# EAGLE board Controller3 (EAGLE 5.10)

Size 116.21 x 231.14 mm. Coordinates in mm from the lower left corner, seen from the top.
Outline: 0,7.62 0,10.16
Outline: 0,10.16 0,12.7
Outline: 0,12.7 0,15.24
Outline: 0,15.24 0,17.78
Outline: 0,33.02 5.72,33.02
Outline: 5.72,33.02 10.16,33.02
Outline: 10.16,33.02 14.61,33.02
Outline: 14.61,33.02 19.05,33.02
Outline: 19.05,33.02 23.5,33.02
Outline: 23.5,33.02 27.94,33.02
Outline: 27.94,33.02 32.39,33.02
Outline: 32.39,33.02 36.83,33.02
Outline: 36.83,33.02 41.28,33.02
Outline: 41.28,33.02 45.72,33.02
Outline: 45.72,33.02 50.16,33.02
Outline: 50.16,33.02 54.61,33.02
Outline: 59.06,33.02 63.5,33.02
Outline: 63.5,33.02 67.95,33.02
Outline: 67.95,33.02 72.39,33.02
Outline: 72.39,33.02 76.84,33.02
Outline: 76.84,33.02 81.28,33.02
Outline: 81.28,33.02 85.73,33.02
Outline: 85.73,33.02 90.17,33.02
Outline: 90.17,33.02 94.62,33.02
Outline: 94.62,33.02 99.06,33.02
Outline: 99.06,33.02 103.5,33.02
Outline: 103.5,33.02 110.49,33.02
Outline: 116.21,24.77 116.21,27.94
Outline: 116.21,27.94 116.21,33.02
Outline: 7.62,5.08 0,5.08
Outline: 50.16,9.53 53.98,9.53 53.98,3.81
Outline: 50.16,9.53 43.18,9.53 43.18,24.77 60.33,24.77 60.33,3.81
Outline: 50.16,9.53 50.16,5.08 42.55,5.08 37.47,10.16 11.43,10.16 11.43,17.78 6.99,17.78
Outline: 73.03,9.53 69.22,9.53
Outline: 73.03,9.53 79.38,9.53
Outline: 69.22,9.53 69.22,3.81 60.33,3.81
Outline: 73.03,9.53 73.03,2.54
Outline: 92.08,9.53 88.27,9.53
Outline: 88.27,9.53 81.92,9.53 81.92,24.77 98.42,24.77 98.42,9.53
Outline: 92.08,9.53 98.42,9.53
Outline: 88.27,9.53 88.27,2.54 79.38,2.54
Outline: 92.08,9.53 92.08,1.27
Outline: 110.49,9.53 106.68,9.53
Outline: 106.68,9.53 100.33,9.53 100.33,24.77 116.21,24.77
Outline: 110.49,9.53 116.21,9.53
Outline: 116.21,9.53 116.21,24.77
Outline: 116.21,9.53 116.21,0 110.49,0
Outline: 69.22,9.53 62.87,9.53 62.87,24.77 79.38,24.77 79.38,9.53
Outline: 6.99,17.78 6.99,20.32 0,20.32
Outline: 6.99,17.78 0,17.78
Outline: 0,20.32 0,27.94
Outline: 0,27.94 0,33.02
Outline: 110.49,0 0,0 0,7.62
Outline: 110.49,9.53 110.49,0
Outline: 106.68,9.53 106.68,1.27 98.42,1.27
Outline: 98.42,1.27 92.08,1.27
Outline: 79.38,1.27 40.64,1.27
Outline: 40.64,1.27 7.62,1.27 7.62,5.08
Outline: 98.42,1.27 98.42,9.53
Outline: 79.38,2.54 73.03,2.54
Outline: 92.08,1.27 78.74,1.27
Outline: 79.38,9.53 79.38,2.54
Outline: 73.03,2.54 41.28,2.54 36.2,7.62 8.89,7.62 8.89,12.7 0,12.7
Outline: 40.64,1.27 35.56,6.35 7.62,6.35
Outline: 60.33,3.81 53.98,3.81
Outline: 53.98,3.81 41.91,3.81 36.83,8.89 10.16,8.89 10.16,15.24 0,15.24
Outline: 0,10.16 7.62,10.16 7.62,7.62
Outline: 7.62,7.62 7.62,6.35
Outline: 7.62,5.08 7.62,6.35
Outline: 0,7.62 7.62,7.62
Outline: 0,17.78 0,20.32
Outline: 0,27.94 5.72,27.94
Outline: 5.72,27.94 10.16,27.94
Outline: 10.16,27.94 14.61,27.94
Outline: 14.61,27.94 19.05,27.94
Outline: 19.05,27.94 23.5,27.94
Outline: 23.5,27.94 27.94,27.94
Outline: 27.94,27.94 32.39,27.94
Outline: 32.39,27.94 36.83,27.94
Outline: 36.83,27.94 41.28,27.94
Outline: 41.28,27.94 45.72,27.94
Outline: 45.72,27.94 50.16,27.94
Outline: 50.16,27.94 54.61,27.94
Outline: 54.61,27.94 59.06,27.94
Outline: 59.06,27.94 63.5,27.94
Outline: 63.5,27.94 67.95,27.94
Outline: 67.95,27.94 72.39,27.94
Outline: 72.39,27.94 76.84,27.94
Outline: 76.84,27.94 81.28,27.94
Outline: 81.28,27.94 85.73,27.94
Outline: 85.73,27.94 90.17,27.94
Outline: 90.17,27.94 94.62,27.94
Outline: 94.62,27.94 99.06,27.94
Outline: 99.06,27.94 103.5,27.94
Outline: 116.21,27.94 107.95,27.94
Outline: 107.95,27.94 103.5,27.94
Outline: 103.5,27.94 103.5,33.02
Outline: 99.06,27.94 99.06,33.02
Outline: 94.62,27.94 94.62,33.02
Outline: 90.17,27.94 90.17,33.02
Outline: 85.73,27.94 85.73,33.02
Outline: 81.28,27.94 81.28,33.02
Outline: 76.84,27.94 76.84,33.02
Outline: 72.39,27.94 72.39,33.02
Outline: 67.95,27.94 67.95,33.02
Outline: 63.5,27.94 63.5,33.02
Outline: 59.06,27.94 59.06,33.02
Outline: 54.61,27.94 54.61,33.02
Outline: 50.16,27.94 50.16,33.02
Outline: 45.72,27.94 45.72,33.02
Outline: 41.28,27.94 41.28,33.02
Outline: 36.83,27.94 36.83,33.02
Outline: 32.39,27.94 32.39,33.02
Outline: 27.94,27.94 27.94,33.02
Outline: 23.5,27.94 23.5,33.02
Outline: 19.05,27.94 19.05,33.02
Outline: 14.61,27.94 14.61,33.02
Outline: 10.16,27.94 10.16,33.02
Outline: 5.72,27.94 5.72,33.02
Outline: 107.95,27.94 107.95,33.02
Outline: 0,40.64 0,43.18
Outline: 0,43.18 0,45.72
Outline: 0,45.72 0,48.26
Outline: 0,48.26 0,50.8
Outline: 0,66.04 5.72,66.04
Outline: 5.72,66.04 10.16,66.04
Outline: 10.16,66.04 14.61,66.04
Outline: 14.61,66.04 19.05,66.04
Outline: 19.05,66.04 23.5,66.04
Outline: 23.5,66.04 27.94,66.04
Outline: 27.94,66.04 32.39,66.04
Outline: 32.39,66.04 36.83,66.04
Outline: 36.83,66.04 41.28,66.04
Outline: 41.28,66.04 45.72,66.04
Outline: 45.72,66.04 50.16,66.04
Outline: 50.16,66.04 54.61,66.04
Outline: 59.06,66.04 63.5,66.04
Outline: 63.5,66.04 67.95,66.04
Outline: 67.95,66.04 72.39,66.04
Outline: 72.39,66.04 76.84,66.04
Outline: 76.84,66.04 81.28,66.04
Outline: 81.28,66.04 85.73,66.04
Outline: 85.73,66.04 90.17,66.04
Outline: 90.17,66.04 94.62,66.04
Outline: 94.62,66.04 99.06,66.04
Outline: 99.06,66.04 103.5,66.04
Outline: 103.5,66.04 110.49,66.04
Outline: 116.21,57.78 116.21,60.96
Outline: 116.21,60.96 116.21,66.04
Outline: 7.62,38.1 0,38.1
Outline: 50.16,42.55 53.98,42.55 53.98,36.83
Outline: 50.16,42.55 43.18,42.55 43.18,57.78 60.33,57.78 60.33,36.83
Outline: 50.16,42.55 50.16,38.1 42.55,38.1 37.47,43.18 11.43,43.18 11.43,50.8 6.99,50.8
Outline: 73.03,42.55 69.22,42.55
Outline: 73.03,42.55 79.38,42.55
Outline: 69.22,42.55 69.22,36.83 60.33,36.83
Outline: 73.03,42.55 73.03,35.56
Outline: 92.08,42.55 88.27,42.55
Outline: 88.27,42.55 81.92,42.55 81.92,57.78 98.42,57.78 98.42,42.55
Outline: 92.08,42.55 98.42,42.55
Outline: 88.27,42.55 88.27,35.56 79.38,35.56
Outline: 92.08,42.55 92.08,34.29
Outline: 110.49,42.55 106.68,42.55
Outline: 106.68,42.55 100.33,42.55 100.33,57.78 116.21,57.78
Outline: 110.49,42.55 116.21,42.55
Outline: 116.21,42.55 116.21,57.78
Outline: 116.21,33.02 116.21,42.55
Outline: 69.22,42.55 62.87,42.55 62.87,57.78 79.38,57.78 79.38,42.55
Outline: 6.99,50.8 6.99,53.34 0,53.34
Outline: 6.99,50.8 0,50.8
Outline: 0,53.34 0,60.96
Outline: 0,60.96 0,66.04
Outline: 54.61,33.02 59.06,33.02
Outline: 110.49,33.02 116.21,33.02
Outline: 0,40.64 0,33.02
Outline: 110.49,42.55 110.49,33.02
Outline: 106.68,42.55 106.68,34.29 98.42,34.29
Outline: 98.42,34.29 92.08,34.29
Outline: 79.38,34.29 40.64,34.29
Outline: 40.64,34.29 7.62,34.29 7.62,38.1
Outline: 98.42,34.29 98.42,42.55
Outline: 79.38,35.56 73.03,35.56
Outline: 92.08,34.29 78.74,34.29
Outline: 79.38,42.55 79.38,35.56
Outline: 73.03,35.56 41.28,35.56 36.2,40.64 8.89,40.64 8.89,45.72 0,45.72
Outline: 40.64,34.29 35.56,39.37 7.62,39.37
Outline: 60.33,36.83 53.98,36.83
Outline: 53.98,36.83 41.91,36.83 36.83,41.91 10.16,41.91 10.16,48.26 0,48.26
Outline: 0,43.18 7.62,43.18 7.62,40.64
Outline: 7.62,40.64 7.62,39.37
Outline: 7.62,38.1 7.62,39.37
Outline: 0,40.64 7.62,40.64
Outline: 0,50.8 0,53.34
Outline: 0,60.96 5.72,60.96
Outline: 5.72,60.96 10.16,60.96
Outline: 10.16,60.96 14.61,60.96
Outline: 14.61,60.96 19.05,60.96
Outline: 19.05,60.96 23.5,60.96
Outline: 23.5,60.96 27.94,60.96
Outline: 27.94,60.96 32.39,60.96
Outline: 32.39,60.96 36.83,60.96
Outline: 36.83,60.96 41.28,60.96
Outline: 41.28,60.96 45.72,60.96
Outline: 45.72,60.96 50.16,60.96
Outline: 50.16,60.96 54.61,60.96
Outline: 54.61,60.96 59.06,60.96
Outline: 59.06,60.96 63.5,60.96
Outline: 63.5,60.96 67.95,60.96
Outline: 67.95,60.96 72.39,60.96
Outline: 72.39,60.96 76.84,60.96
Outline: 76.84,60.96 81.28,60.96
Outline: 81.28,60.96 85.73,60.96
Outline: 85.73,60.96 90.17,60.96
Outline: 90.17,60.96 94.62,60.96
Outline: 94.62,60.96 99.06,60.96
Outline: 99.06,60.96 103.5,60.96
Outline: 116.21,60.96 107.95,60.96
Outline: 107.95,60.96 103.5,60.96
Outline: 103.5,60.96 103.5,66.04
Outline: 99.06,60.96 99.06,66.04
Outline: 94.62,60.96 94.62,66.04
Outline: 90.17,60.96 90.17,66.04
Outline: 85.73,60.96 85.73,66.04
Outline: 81.28,60.96 81.28,66.04
Outline: 76.84,60.96 76.84,66.04
Outline: 72.39,60.96 72.39,66.04
Outline: 67.95,60.96 67.95,66.04
Outline: 63.5,60.96 63.5,66.04
Outline: 59.06,60.96 59.06,66.04
Outline: 54.61,60.96 54.61,66.04
Outline: 50.16,60.96 50.16,66.04
Outline: 45.72,60.96 45.72,66.04
Outline: 41.28,60.96 41.28,66.04
Outline: 36.83,60.96 36.83,66.04
Outline: 32.39,60.96 32.39,66.04
Outline: 27.94,60.96 27.94,66.04
Outline: 23.5,60.96 23.5,66.04
Outline: 19.05,60.96 19.05,66.04
Outline: 14.61,60.96 14.61,66.04
Outline: 10.16,60.96 10.16,66.04
Outline: 5.72,60.96 5.72,66.04
Outline: 107.95,60.96 107.95,66.04
Outline: 0,73.66 0,76.2
Outline: 0,76.2 0,78.74
Outline: 0,78.74 0,81.28
Outline: 0,81.28 0,83.82
Outline: 0,99.06 5.72,99.06
Outline: 5.72,99.06 10.16,99.06
Outline: 10.16,99.06 14.61,99.06
Outline: 14.61,99.06 19.05,99.06
Outline: 19.05,99.06 23.5,99.06
Outline: 23.5,99.06 27.94,99.06
Outline: 27.94,99.06 32.39,99.06
Outline: 32.39,99.06 36.83,99.06
Outline: 36.83,99.06 41.28,99.06
Outline: 41.28,99.06 45.72,99.06
Outline: 45.72,99.06 50.16,99.06
Outline: 50.16,99.06 54.61,99.06
Outline: 59.06,99.06 63.5,99.06
Outline: 63.5,99.06 67.95,99.06
Outline: 67.95,99.06 72.39,99.06
Outline: 72.39,99.06 76.84,99.06
Outline: 76.84,99.06 81.28,99.06
Outline: 81.28,99.06 85.73,99.06
Outline: 85.73,99.06 90.17,99.06
Outline: 90.17,99.06 94.62,99.06
Outline: 94.62,99.06 99.06,99.06
Outline: 99.06,99.06 103.5,99.06
Outline: 103.5,99.06 110.49,99.06
Outline: 116.21,90.8 116.21,93.98
Outline: 116.21,93.98 116.21,99.06
Outline: 7.62,71.12 0,71.12
Outline: 50.16,75.56 53.98,75.56 53.98,69.85
Outline: 50.16,75.56 43.18,75.56 43.18,90.8 60.33,90.8 60.33,69.85
Outline: 50.16,75.56 50.16,71.12 42.55,71.12 37.47,76.2 11.43,76.2 11.43,83.82 6.99,83.82
Outline: 73.03,75.56 69.22,75.56
Outline: 73.03,75.56 79.38,75.56
Outline: 69.22,75.56 69.22,69.85 60.33,69.85
Outline: 73.03,75.56 73.03,68.58
Outline: 92.08,75.56 88.27,75.56
Outline: 88.27,75.56 81.92,75.56 81.92,90.8 98.42,90.8 98.42,75.56
Outline: 92.08,75.56 98.42,75.56
Outline: 88.27,75.56 88.27,68.58 79.38,68.58
Outline: 92.08,75.56 92.08,67.31
Outline: 110.49,75.56 106.68,75.56
Outline: 106.68,75.56 100.33,75.56 100.33,90.8 116.21,90.8
Outline: 110.49,75.56 116.21,75.56
Outline: 116.21,75.56 116.21,90.8
Outline: 116.21,66.04 116.21,75.56
Outline: 69.22,75.56 62.87,75.56 62.87,90.8 79.38,90.8 79.38,75.56
Outline: 6.99,83.82 6.99,86.36 0,86.36
Outline: 6.99,83.82 0,83.82
Outline: 0,86.36 0,93.98
Outline: 0,93.98 0,99.06
Outline: 54.61,66.04 59.06,66.04
Outline: 110.49,66.04 116.21,66.04
Outline: 0,73.66 0,66.04
Outline: 110.49,75.56 110.49,66.04
Outline: 106.68,75.56 106.68,67.31 98.42,67.31
Outline: 98.42,67.31 92.08,67.31
Outline: 79.38,67.31 40.64,67.31
Outline: 40.64,67.31 7.62,67.31 7.62,71.12
Outline: 98.42,67.31 98.42,75.56
Outline: 79.38,68.58 73.03,68.58
Outline: 92.08,67.31 78.74,67.31
Outline: 79.38,75.56 79.38,68.58
Outline: 73.03,68.58 41.28,68.58 36.2,73.66 8.89,73.66 8.89,78.74 0,78.74
Outline: 40.64,67.31 35.56,72.39 7.62,72.39
Outline: 60.33,69.85 53.98,69.85
Outline: 53.98,69.85 41.91,69.85 36.83,74.93 10.16,74.93 10.16,81.28 0,81.28
Outline: 0,76.2 7.62,76.2 7.62,73.66
Outline: 7.62,73.66 7.62,72.39
Outline: 7.62,71.12 7.62,72.39
Outline: 0,73.66 7.62,73.66
Outline: 0,83.82 0,86.36
Outline: 0,93.98 5.72,93.98
Outline: 5.72,93.98 10.16,93.98
Outline: 10.16,93.98 14.61,93.98
Outline: 14.61,93.98 19.05,93.98
Outline: 19.05,93.98 23.5,93.98
Outline: 23.5,93.98 27.94,93.98
Outline: 27.94,93.98 32.39,93.98
Outline: 32.39,93.98 36.83,93.98
Outline: 36.83,93.98 41.28,93.98
Outline: 41.28,93.98 45.72,93.98
Outline: 45.72,93.98 50.16,93.98
Outline: 50.16,93.98 54.61,93.98
Outline: 54.61,93.98 59.06,93.98
Outline: 59.06,93.98 63.5,93.98
Outline: 63.5,93.98 67.95,93.98
Outline: 67.95,93.98 72.39,93.98
Outline: 72.39,93.98 76.84,93.98
Outline: 76.84,93.98 81.28,93.98
Outline: 81.28,93.98 85.73,93.98
Outline: 85.73,93.98 90.17,93.98
Outline: 90.17,93.98 94.62,93.98
Outline: 94.62,93.98 99.06,93.98
Outline: 99.06,93.98 103.5,93.98
Outline: 116.21,93.98 107.95,93.98
Outline: 107.95,93.98 103.5,93.98
Outline: 103.5,93.98 103.5,99.06
Outline: 99.06,93.98 99.06,99.06
Outline: 94.62,93.98 94.62,99.06
Outline: 90.17,93.98 90.17,99.06
Outline: 85.73,93.98 85.73,99.06
Outline: 81.28,93.98 81.28,99.06
Outline: 76.84,93.98 76.84,99.06
Outline: 72.39,93.98 72.39,99.06
Outline: 67.95,93.98 67.95,99.06
Outline: 63.5,93.98 63.5,99.06
Outline: 59.06,93.98 59.06,99.06
Outline: 54.61,93.98 54.61,99.06
Outline: 50.16,93.98 50.16,99.06
Outline: 45.72,93.98 45.72,99.06
Outline: 41.28,93.98 41.28,99.06
Outline: 36.83,93.98 36.83,99.06
Outline: 32.39,93.98 32.39,99.06
Outline: 27.94,93.98 27.94,99.06
Outline: 23.5,93.98 23.5,99.06
Outline: 19.05,93.98 19.05,99.06
Outline: 14.61,93.98 14.61,99.06
Outline: 10.16,93.98 10.16,99.06
Outline: 5.72,93.98 5.72,99.06
Outline: 107.95,93.98 107.95,99.06
Outline: 0,106.68 0,109.22
Outline: 0,109.22 0,111.76
Outline: 0,111.76 0,114.3
Outline: 0,114.3 0,116.84
Outline: 0,132.08 5.72,132.08
Outline: 5.72,132.08 10.16,132.08
Outline: 10.16,132.08 14.61,132.08
Outline: 14.61,132.08 19.05,132.08
Outline: 19.05,132.08 23.5,132.08
Outline: 23.5,132.08 27.94,132.08
Outline: 27.94,132.08 32.39,132.08
Outline: 32.39,132.08 36.83,132.08
Outline: 36.83,132.08 41.28,132.08
Outline: 41.28,132.08 45.72,132.08
Outline: 45.72,132.08 50.16,132.08
Outline: 50.16,132.08 54.61,132.08
Outline: 59.06,132.08 63.5,132.08
Outline: 63.5,132.08 67.95,132.08
Outline: 67.95,132.08 72.39,132.08
Outline: 72.39,132.08 76.84,132.08
Outline: 76.84,132.08 81.28,132.08
Outline: 81.28,132.08 85.73,132.08
Outline: 85.73,132.08 90.17,132.08
Outline: 90.17,132.08 94.62,132.08
Outline: 94.62,132.08 99.06,132.08
Outline: 99.06,132.08 103.5,132.08
Outline: 103.5,132.08 110.49,132.08
Outline: 116.21,123.83 116.21,127
Outline: 116.21,127 116.21,132.08
Outline: 7.62,104.14 0,104.14
Outline: 50.16,108.58 53.98,108.58 53.98,102.87
Outline: 50.16,108.58 43.18,108.58 43.18,123.83 60.33,123.83 60.33,102.87
Outline: 50.16,108.58 50.16,104.14 42.55,104.14 37.47,109.22 11.43,109.22 11.43,116.84 6.99,116.84
Outline: 73.03,108.58 69.22,108.58
Outline: 73.03,108.58 79.38,108.58
Outline: 69.22,108.58 69.22,102.87 60.33,102.87
Outline: 73.03,108.58 73.03,101.6
Outline: 92.08,108.58 88.27,108.58
Outline: 88.27,108.58 81.92,108.58 81.92,123.83 98.42,123.83 98.42,108.58
Outline: 92.08,108.58 98.42,108.58
Outline: 88.27,108.58 88.27,101.6 79.38,101.6
Outline: 92.08,108.58 92.08,100.33
Outline: 110.49,108.58 106.68,108.58
Outline: 106.68,108.58 100.33,108.58 100.33,123.83 116.21,123.83
Outline: 110.49,108.58 116.21,108.58
Outline: 116.21,108.58 116.21,123.83
Outline: 116.21,99.06 116.21,108.58
Outline: 69.22,108.58 62.87,108.58 62.87,123.83 79.38,123.83 79.38,108.58
Outline: 6.99,116.84 6.99,119.38 0,119.38
Outline: 6.99,116.84 0,116.84
Outline: 0,119.38 0,127
Outline: 0,127 0,132.08
Outline: 54.61,99.06 59.06,99.06
Outline: 110.49,99.06 116.21,99.06
Outline: 0,106.68 0,99.06
Outline: 110.49,108.58 110.49,99.06
Outline: 106.68,108.58 106.68,100.33 98.42,100.33
Outline: 98.42,100.33 92.08,100.33
Outline: 79.38,100.33 40.64,100.33
Outline: 40.64,100.33 7.62,100.33 7.62,104.14
Outline: 98.42,100.33 98.42,108.58
Outline: 79.38,101.6 73.03,101.6
Outline: 92.08,100.33 78.74,100.33
Outline: 79.38,108.58 79.38,101.6
Outline: 73.03,101.6 41.28,101.6 36.2,106.68 8.89,106.68 8.89,111.76 0,111.76
Outline: 40.64,100.33 35.56,105.41 7.62,105.41
Outline: 60.33,102.87 53.98,102.87
Outline: 53.98,102.87 41.91,102.87 36.83,107.95 10.16,107.95 10.16,114.3 0,114.3
Outline: 0,109.22 7.62,109.22 7.62,106.68
Outline: 7.62,106.68 7.62,105.41
Outline: 7.62,104.14 7.62,105.41
Outline: 0,106.68 7.62,106.68
Outline: 0,116.84 0,119.38
Outline: 0,127 5.72,127
Outline: 5.72,127 10.16,127
Outline: 10.16,127 14.61,127
Outline: 14.61,127 19.05,127
Outline: 19.05,127 23.5,127
Outline: 23.5,127 27.94,127
Outline: 27.94,127 32.39,127
Outline: 32.39,127 36.83,127
Outline: 36.83,127 41.28,127
Outline: 41.28,127 45.72,127
Outline: 45.72,127 50.16,127
Outline: 50.16,127 54.61,127
Outline: 54.61,127 59.06,127
Outline: 59.06,127 63.5,127
Outline: 63.5,127 67.95,127
Outline: 67.95,127 72.39,127
Outline: 72.39,127 76.84,127
Outline: 76.84,127 81.28,127
Outline: 81.28,127 85.73,127
Outline: 85.73,127 90.17,127
Outline: 90.17,127 94.62,127
Outline: 94.62,127 99.06,127
Outline: 99.06,127 103.5,127
Outline: 116.21,127 107.95,127
Outline: 107.95,127 103.5,127
Outline: 103.5,127 103.5,132.08
Outline: 99.06,127 99.06,132.08
Outline: 94.62,127 94.62,132.08
Outline: 90.17,127 90.17,132.08
Outline: 85.73,127 85.73,132.08
Outline: 81.28,127 81.28,132.08
Outline: 76.84,127 76.84,132.08
Outline: 72.39,127 72.39,132.08
Outline: 67.95,127 67.95,132.08
Outline: 63.5,127 63.5,132.08
Outline: 59.06,127 59.06,132.08
Outline: 54.61,127 54.61,132.08
Outline: 50.16,127 50.16,132.08
Outline: 45.72,127 45.72,132.08
Outline: 41.28,127 41.28,132.08
Outline: 36.83,127 36.83,132.08
Outline: 32.39,127 32.39,132.08
Outline: 27.94,127 27.94,132.08
Outline: 23.5,127 23.5,132.08
Outline: 19.05,127 19.05,132.08
Outline: 14.61,127 14.61,132.08
Outline: 10.16,127 10.16,132.08
Outline: 5.72,127 5.72,132.08
Outline: 107.95,127 107.95,132.08
Outline: 0,139.7 0,142.24
Outline: 0,142.24 0,144.78
Outline: 0,144.78 0,147.32
Outline: 0,147.32 0,149.86
Outline: 0,165.1 5.72,165.1
Outline: 5.72,165.1 10.16,165.1
Outline: 10.16,165.1 14.61,165.1
Outline: 14.61,165.1 19.05,165.1
Outline: 19.05,165.1 23.5,165.1
Outline: 23.5,165.1 27.94,165.1
Outline: 27.94,165.1 32.39,165.1
Outline: 32.39,165.1 36.83,165.1
Outline: 36.83,165.1 41.28,165.1
Outline: 41.28,165.1 45.72,165.1
Outline: 45.72,165.1 50.16,165.1
Outline: 50.16,165.1 54.61,165.1
Outline: 59.06,165.1 63.5,165.1
Outline: 63.5,165.1 67.95,165.1
Outline: 67.95,165.1 72.39,165.1
Outline: 72.39,165.1 76.84,165.1
Outline: 76.84,165.1 81.28,165.1
Outline: 81.28,165.1 85.73,165.1
Outline: 85.73,165.1 90.17,165.1
Outline: 90.17,165.1 94.62,165.1
Outline: 94.62,165.1 99.06,165.1
Outline: 99.06,165.1 103.5,165.1
Outline: 103.5,165.1 110.49,165.1
Outline: 116.21,156.84 116.21,160.02
Outline: 116.21,160.02 116.21,165.1
Outline: 7.62,137.16 0,137.16
Outline: 50.16,141.6 53.98,141.6 53.98,135.89
Outline: 50.16,141.6 43.18,141.6 43.18,156.84 60.33,156.84 60.33,135.89
Outline: 50.16,141.6 50.16,137.16 42.55,137.16 37.47,142.24 11.43,142.24 11.43,149.86 6.99,149.86
Outline: 73.03,141.6 69.22,141.6
Outline: 73.03,141.6 79.38,141.6
Outline: 69.22,141.6 69.22,135.89 60.33,135.89
Outline: 73.03,141.6 73.03,134.62
Outline: 92.08,141.6 88.27,141.6
Outline: 88.27,141.6 81.92,141.6 81.92,156.84 98.42,156.84 98.42,141.6
Outline: 92.08,141.6 98.42,141.6
Outline: 88.27,141.6 88.27,134.62 79.38,134.62
Outline: 92.08,141.6 92.08,133.35
Outline: 110.49,141.6 106.68,141.6
Outline: 106.68,141.6 100.33,141.6 100.33,156.84 116.21,156.84
Outline: 110.49,141.6 116.21,141.6
Outline: 116.21,141.6 116.21,156.84
Outline: 116.21,132.08 116.21,141.6
Outline: 69.22,141.6 62.87,141.6 62.87,156.84 79.38,156.84 79.38,141.6
Outline: 6.99,149.86 6.99,152.4 0,152.4
Outline: 6.99,149.86 0,149.86
Outline: 0,152.4 0,160.02
Outline: 0,160.02 0,165.1
Outline: 54.61,132.08 59.06,132.08
Outline: 110.49,132.08 116.21,132.08
Outline: 0,139.7 0,132.08
Outline: 110.49,141.6 110.49,132.08
Outline: 106.68,141.6 106.68,133.35 98.42,133.35
Outline: 98.42,133.35 92.08,133.35
Outline: 79.38,133.35 40.64,133.35
Outline: 40.64,133.35 7.62,133.35 7.62,137.16
Outline: 98.42,133.35 98.42,141.6
Outline: 79.38,134.62 73.03,134.62
Outline: 92.08,133.35 78.74,133.35
Outline: 79.38,141.6 79.38,134.62
Outline: 73.03,134.62 41.28,134.62 36.2,139.7 8.89,139.7 8.89,144.78 0,144.78
Outline: 40.64,133.35 35.56,138.43 7.62,138.43
Outline: 60.33,135.89 53.98,135.89
Outline: 53.98,135.89 41.91,135.89 36.83,140.97 10.16,140.97 10.16,147.32 0,147.32
Outline: 0,142.24 7.62,142.24 7.62,139.7
Outline: 7.62,139.7 7.62,138.43
Outline: 7.62,137.16 7.62,138.43
Outline: 0,139.7 7.62,139.7
Outline: 0,149.86 0,152.4
Outline: 0,160.02 5.72,160.02
Outline: 5.72,160.02 10.16,160.02
Outline: 10.16,160.02 14.61,160.02
Outline: 14.61,160.02 19.05,160.02
Outline: 19.05,160.02 23.5,160.02
Outline: 23.5,160.02 27.94,160.02
Outline: 27.94,160.02 32.39,160.02
Outline: 32.39,160.02 36.83,160.02
Outline: 36.83,160.02 41.28,160.02
Outline: 41.28,160.02 45.72,160.02
Outline: 45.72,160.02 50.16,160.02
Outline: 50.16,160.02 54.61,160.02
Outline: 54.61,160.02 59.06,160.02
Outline: 59.06,160.02 63.5,160.02
Outline: 63.5,160.02 67.95,160.02
Outline: 67.95,160.02 72.39,160.02
Outline: 72.39,160.02 76.84,160.02
Outline: 76.84,160.02 81.28,160.02
Outline: 81.28,160.02 85.73,160.02
Outline: 85.73,160.02 90.17,160.02
Outline: 90.17,160.02 94.62,160.02
Outline: 94.62,160.02 99.06,160.02
Outline: 99.06,160.02 103.5,160.02
Outline: 116.21,160.02 107.95,160.02
Outline: 107.95,160.02 103.5,160.02
Outline: 103.5,160.02 103.5,165.1
Outline: 99.06,160.02 99.06,165.1
Outline: 94.62,160.02 94.62,165.1
Outline: 90.17,160.02 90.17,165.1
Outline: 85.73,160.02 85.73,165.1
Outline: 81.28,160.02 81.28,165.1
Outline: 76.84,160.02 76.84,165.1
Outline: 72.39,160.02 72.39,165.1
Outline: 67.95,160.02 67.95,165.1
Outline: 63.5,160.02 63.5,165.1
Outline: 59.06,160.02 59.06,165.1
Outline: 54.61,160.02 54.61,165.1
Outline: 50.16,160.02 50.16,165.1
Outline: 45.72,160.02 45.72,165.1
Outline: 41.28,160.02 41.28,165.1
Outline: 36.83,160.02 36.83,165.1
Outline: 32.39,160.02 32.39,165.1
Outline: 27.94,160.02 27.94,165.1
Outline: 23.5,160.02 23.5,165.1
Outline: 19.05,160.02 19.05,165.1
Outline: 14.61,160.02 14.61,165.1
Outline: 10.16,160.02 10.16,165.1
Outline: 5.72,160.02 5.72,165.1
Outline: 107.95,160.02 107.95,165.1
Outline: 0,172.72 0,175.26
Outline: 0,175.26 0,177.8
Outline: 0,177.8 0,180.34
Outline: 0,180.34 0,182.88
Outline: 0,198.12 5.72,198.12
Outline: 5.72,198.12 10.16,198.12
Outline: 10.16,198.12 14.61,198.12
Outline: 14.61,198.12 19.05,198.12
Outline: 19.05,198.12 23.5,198.12
Outline: 23.5,198.12 27.94,198.12
Outline: 27.94,198.12 32.39,198.12
Outline: 32.39,198.12 36.83,198.12
Outline: 36.83,198.12 41.28,198.12
Outline: 41.28,198.12 45.72,198.12
Outline: 45.72,198.12 50.16,198.12
Outline: 50.16,198.12 54.61,198.12
Outline: 59.06,198.12 63.5,198.12
Outline: 63.5,198.12 67.95,198.12
Outline: 67.95,198.12 72.39,198.12
Outline: 72.39,198.12 76.84,198.12
Outline: 76.84,198.12 81.28,198.12
Outline: 81.28,198.12 85.73,198.12
Outline: 85.73,198.12 90.17,198.12
Outline: 90.17,198.12 94.62,198.12
Outline: 94.62,198.12 99.06,198.12
Outline: 99.06,198.12 103.5,198.12
Outline: 103.5,198.12 110.49,198.12
Outline: 116.21,189.87 116.21,193.04
Outline: 116.21,193.04 116.21,198.12
Outline: 7.62,170.18 0,170.18
Outline: 50.16,174.62 53.98,174.62 53.98,168.91
Outline: 50.16,174.62 43.18,174.62 43.18,189.87 60.33,189.87 60.33,168.91
Outline: 50.16,174.62 50.16,170.18 42.55,170.18 37.47,175.26 11.43,175.26 11.43,182.88 6.99,182.88
Outline: 73.03,174.62 69.22,174.62
Outline: 73.03,174.62 79.38,174.62
Outline: 69.22,174.62 69.22,168.91 60.33,168.91
Outline: 73.03,174.62 73.03,167.64
Outline: 92.08,174.62 88.27,174.62
Outline: 88.27,174.62 81.92,174.62 81.92,189.87 98.42,189.87 98.42,174.62
Outline: 92.08,174.62 98.42,174.62
Outline: 88.27,174.62 88.27,167.64 79.38,167.64
Outline: 92.08,174.62 92.08,166.37
Outline: 110.49,174.62 106.68,174.62
Outline: 106.68,174.62 100.33,174.62 100.33,189.87 116.21,189.87
Outline: 110.49,174.62 116.21,174.62
Outline: 116.21,174.62 116.21,189.87
Outline: 116.21,165.1 116.21,174.62
Outline: 69.22,174.62 62.87,174.62 62.87,189.87 79.38,189.87 79.38,174.62
Outline: 6.99,182.88 6.99,185.42 0,185.42
Outline: 6.99,182.88 0,182.88
Outline: 0,185.42 0,193.04
Outline: 0,193.04 0,198.12
Outline: 54.61,165.1 59.06,165.1
Outline: 110.49,165.1 116.21,165.1
Outline: 0,172.72 0,165.1
Outline: 110.49,174.62 110.49,165.1
Outline: 106.68,174.62 106.68,166.37 98.42,166.37
Outline: 98.42,166.37 92.08,166.37
Outline: 79.38,166.37 40.64,166.37
Outline: 40.64,166.37 7.62,166.37 7.62,170.18
Outline: 98.42,166.37 98.42,174.62
Outline: 79.38,167.64 73.03,167.64
Outline: 92.08,166.37 78.74,166.37
Outline: 79.38,174.62 79.38,167.64
Outline: 73.03,167.64 41.28,167.64 36.2,172.72 8.89,172.72 8.89,177.8 0,177.8
Outline: 40.64,166.37 35.56,171.45 7.62,171.45
Outline: 60.33,168.91 53.98,168.91
Outline: 53.98,168.91 41.91,168.91 36.83,173.99 10.16,173.99 10.16,180.34 0,180.34
Outline: 0,175.26 7.62,175.26 7.62,172.72
Outline: 7.62,172.72 7.62,171.45
Outline: 7.62,170.18 7.62,171.45
Outline: 0,172.72 7.62,172.72
Outline: 0,182.88 0,185.42
Outline: 0,193.04 5.72,193.04
Outline: 5.72,193.04 10.16,193.04
Outline: 10.16,193.04 14.61,193.04
Outline: 14.61,193.04 19.05,193.04
Outline: 19.05,193.04 23.5,193.04
Outline: 23.5,193.04 27.94,193.04
Outline: 27.94,193.04 32.39,193.04
Outline: 32.39,193.04 36.83,193.04
Outline: 36.83,193.04 41.28,193.04
Outline: 41.28,193.04 45.72,193.04
Outline: 45.72,193.04 50.16,193.04
Outline: 50.16,193.04 54.61,193.04
Outline: 54.61,193.04 59.06,193.04
Outline: 59.06,193.04 63.5,193.04
Outline: 63.5,193.04 67.95,193.04
Outline: 67.95,193.04 72.39,193.04
Outline: 72.39,193.04 76.84,193.04
Outline: 76.84,193.04 81.28,193.04
Outline: 81.28,193.04 85.73,193.04
Outline: 85.73,193.04 90.17,193.04
Outline: 90.17,193.04 94.62,193.04
Outline: 94.62,193.04 99.06,193.04
Outline: 99.06,193.04 103.5,193.04
Outline: 116.21,193.04 107.95,193.04
Outline: 107.95,193.04 103.5,193.04
Outline: 103.5,193.04 103.5,198.12
Outline: 99.06,193.04 99.06,198.12
Outline: 94.62,193.04 94.62,198.12
Outline: 90.17,193.04 90.17,198.12
Outline: 85.73,193.04 85.73,198.12
Outline: 81.28,193.04 81.28,198.12
Outline: 76.84,193.04 76.84,198.12
Outline: 72.39,193.04 72.39,198.12
Outline: 67.95,193.04 67.95,198.12
Outline: 63.5,193.04 63.5,198.12
Outline: 59.06,193.04 59.06,198.12
Outline: 54.61,193.04 54.61,198.12
Outline: 50.16,193.04 50.16,198.12
Outline: 45.72,193.04 45.72,198.12
Outline: 41.28,193.04 41.28,198.12
Outline: 36.83,193.04 36.83,198.12
Outline: 32.39,193.04 32.39,198.12
Outline: 27.94,193.04 27.94,198.12
Outline: 23.5,193.04 23.5,198.12
Outline: 19.05,193.04 19.05,198.12
Outline: 14.61,193.04 14.61,198.12
Outline: 10.16,193.04 10.16,198.12
Outline: 5.72,193.04 5.72,198.12
Outline: 107.95,193.04 107.95,198.12
Outline: 0,205.74 0,208.28
Outline: 0,208.28 0,210.82
Outline: 0,210.82 0,213.36
Outline: 0,213.36 0,215.9
Outline: 5.72,231.14 0,231.14 0,226.06
Outline: 5.72,231.14 10.16,231.14
Outline: 10.16,231.14 14.61,231.14
Outline: 14.61,231.14 19.05,231.14
Outline: 19.05,231.14 23.5,231.14
Outline: 23.5,231.14 27.94,231.14
Outline: 27.94,231.14 32.39,231.14
Outline: 32.39,231.14 36.83,231.14
Outline: 36.83,231.14 41.28,231.14
Outline: 41.28,231.14 45.72,231.14
Outline: 45.72,231.14 50.16,231.14
Outline: 50.16,231.14 54.61,231.14
Outline: 59.06,231.14 63.5,231.14
Outline: 63.5,231.14 67.95,231.14
Outline: 67.95,231.14 72.39,231.14
Outline: 72.39,231.14 76.84,231.14
Outline: 76.84,231.14 81.28,231.14
Outline: 81.28,231.14 85.73,231.14
Outline: 85.73,231.14 90.17,231.14
Outline: 90.17,231.14 94.62,231.14
Outline: 94.62,231.14 99.06,231.14
Outline: 99.06,231.14 103.5,231.14
Outline: 103.5,231.14 116.21,231.14 116.21,226.06
Outline: 116.21,222.88 116.21,226.06
Outline: 7.62,203.2 0,203.2
Outline: 50.16,207.65 53.98,207.65 53.98,201.93
Outline: 50.16,207.65 43.18,207.65 43.18,222.88 60.33,222.88 60.33,201.93
Outline: 50.16,207.65 50.16,203.2 42.55,203.2 37.47,208.28 11.43,208.28 11.43,215.9 6.99,215.9
Outline: 73.03,207.65 69.22,207.65
Outline: 73.03,207.65 79.38,207.65
Outline: 69.22,207.65 69.22,201.93 60.33,201.93
Outline: 73.03,207.65 73.03,200.66
Outline: 92.08,207.65 88.27,207.65
Outline: 88.27,207.65 81.92,207.65 81.92,222.88 98.42,222.88 98.42,207.65
Outline: 92.08,207.65 98.42,207.65
Outline: 88.27,207.65 88.27,200.66 79.38,200.66
Outline: 92.08,207.65 92.08,199.39
Outline: 110.49,207.65 106.68,207.65
Outline: 106.68,207.65 100.33,207.65 100.33,222.88 116.21,222.88
Outline: 110.49,207.65 116.21,207.65
Outline: 116.21,207.65 116.21,222.88
Outline: 116.21,198.12 116.21,207.65
Outline: 69.22,207.65 62.87,207.65 62.87,222.88 79.38,222.88 79.38,207.65
Outline: 6.99,215.9 6.99,218.44 0,218.44
Outline: 6.99,215.9 0,215.9
Outline: 0,218.44 0,226.06
Outline: 54.61,198.12 59.06,198.12
Outline: 110.49,198.12 116.21,198.12
Outline: 0,205.74 0,198.12
Outline: 110.49,207.65 110.49,198.12
Outline: 106.68,207.65 106.68,199.39 98.42,199.39
Outline: 98.42,199.39 92.08,199.39
Outline: 79.38,199.39 40.64,199.39
Outline: 40.64,199.39 7.62,199.39 7.62,203.2
Outline: 98.42,199.39 98.42,207.65
Outline: 79.38,200.66 73.03,200.66
Outline: 92.08,199.39 78.74,199.39
Outline: 79.38,207.65 79.38,200.66
Outline: 73.03,200.66 41.28,200.66 36.2,205.74 8.89,205.74 8.89,210.82 0,210.82
Outline: 40.64,199.39 35.56,204.47 7.62,204.47
Outline: 60.33,201.93 53.98,201.93
Outline: 53.98,201.93 41.91,201.93 36.83,207.01 10.16,207.01 10.16,213.36 0,213.36
Outline: 0,208.28 7.62,208.28 7.62,205.74
Outline: 7.62,205.74 7.62,204.47
Outline: 7.62,203.2 7.62,204.47
Outline: 0,205.74 7.62,205.74
Outline: 0,215.9 0,218.44
Outline: 0,226.06 5.72,226.06
Outline: 5.72,226.06 10.16,226.06
Outline: 10.16,226.06 14.61,226.06
Outline: 14.61,226.06 19.05,226.06
Outline: 19.05,226.06 23.5,226.06
Outline: 23.5,226.06 27.94,226.06
Outline: 27.94,226.06 32.39,226.06
Outline: 32.39,226.06 36.83,226.06
Outline: 36.83,226.06 41.28,226.06
Outline: 41.28,226.06 45.72,226.06
Outline: 45.72,226.06 50.16,226.06
Outline: 50.16,226.06 54.61,226.06
Outline: 54.61,226.06 59.06,226.06
Outline: 59.06,226.06 63.5,226.06
Outline: 63.5,226.06 67.95,226.06
Outline: 67.95,226.06 72.39,226.06
Outline: 72.39,226.06 76.84,226.06
Outline: 76.84,226.06 81.28,226.06
Outline: 81.28,226.06 85.73,226.06
Outline: 85.73,226.06 90.17,226.06
Outline: 90.17,226.06 94.62,226.06
Outline: 94.62,226.06 99.06,226.06
Outline: 99.06,226.06 103.5,226.06
Outline: 116.21,226.06 107.95,226.06
Outline: 107.95,226.06 103.5,226.06
Outline: 103.5,226.06 103.5,231.14
Outline: 99.06,226.06 99.06,231.14
Outline: 94.62,226.06 94.62,231.14
Outline: 90.17,226.06 90.17,231.14
Outline: 85.73,226.06 85.73,231.14
Outline: 81.28,226.06 81.28,231.14
Outline: 76.84,226.06 76.84,231.14
Outline: 72.39,226.06 72.39,231.14
Outline: 67.95,226.06 67.95,231.14
Outline: 63.5,226.06 63.5,231.14
Outline: 59.06,226.06 59.06,231.14
Outline: 54.61,226.06 54.61,231.14
Outline: 50.16,226.06 50.16,231.14
Outline: 45.72,226.06 45.72,231.14
Outline: 41.28,226.06 41.28,231.14
Outline: 36.83,226.06 36.83,231.14
Outline: 32.39,226.06 32.39,231.14
Outline: 27.94,226.06 27.94,231.14
Outline: 23.5,226.06 23.5,231.14
Outline: 19.05,226.06 19.05,231.14
Outline: 14.61,226.06 14.61,231.14
Outline: 10.16,226.06 10.16,231.14
Outline: 5.72,226.06 5.72,231.14
Outline: 107.95,226.06 107.95,231.14
Outline: 54.61,231.14 59.06,231.14
Copper layers (1*16): Top 0.035mm / dielectric 1.5mm / Bottom 0.035mm
Design rules "default": minimum track width 10mil, minimum drill 24mil, track to track 8mil, track to pad 8mil, pad to pad 8mil, via to via 8mil, smd to smd 8mil, copper to edge 40mil, drill to drill 8mil, minimum pad ring 10mil, minimum via ring 8mil, stop-mask expansion 4mil, vias tented up to drill 0mil, thermal gap 10mil
Milling: 344 lines

## Footprints (pad centres in the part's own frame; a part is rotated, then mirrored left to right if it is on the bottom)
LED3MM = drill 0.813 octagon: A -1.27,0; K 1.27,0

## Placement (x,y rotation side)
E$1  [LED3MM]  52.07,27.94 90 top
E$2  [LED3MM]  56.52,27.94 90 top
E$3  [LED3MM]  60.96,27.94 90 top
E$4  [LED3MM]  65.41,27.94 90 top
E$5  [LED3MM]  69.85,27.94 90 top
E$6  [LED3MM]  74.3,27.94 90 top
E$7  [LED3MM]  78.74,27.94 90 top
E$8  [LED3MM]  83.19,27.94 90 top
E$9  [LED3MM]  16.51,27.94 90 top
E$10  [LED3MM]  20.96,27.94 90 top
E$11  [LED3MM]  25.4,27.94 90 top
E$12  [LED3MM]  29.84,27.94 90 top
E$13  [LED3MM]  34.29,27.94 90 top
E$14  [LED3MM]  38.73,27.94 90 top
E$15  [LED3MM]  43.18,27.94 90 top
E$16  [LED3MM]  47.62,27.94 90 top
E$17  [LED3MM]  87.63,27.94 90 top
E$18  [LED3MM]  92.08,27.94 90 top
E$19  [LED3MM]  7.62,27.94 90 top
E$20  [LED3MM]  12.06,27.94 90 top
E$21  [LED3MM]  96.52,27.94 90 top
E$22  [LED3MM]  100.97,27.94 90 top
E$23  [LED3MM]  105.41,27.94 90 top
E$24  [LED3MM]  52.07,60.96 90 top
E$25  [LED3MM]  56.52,60.96 90 top
E$26  [LED3MM]  60.96,60.96 90 top
E$27  [LED3MM]  65.41,60.96 90 top
E$28  [LED3MM]  69.85,60.96 90 top
E$29  [LED3MM]  74.3,60.96 90 top
E$30  [LED3MM]  78.74,60.96 90 top
E$31  [LED3MM]  83.19,60.96 90 top
E$32  [LED3MM]  16.51,60.96 90 top
E$33  [LED3MM]  20.96,60.96 90 top
E$34  [LED3MM]  25.4,60.96 90 top
E$35  [LED3MM]  29.84,60.96 90 top
E$36  [LED3MM]  34.29,60.96 90 top
E$37  [LED3MM]  38.73,60.96 90 top
E$38  [LED3MM]  43.18,60.96 90 top
E$39  [LED3MM]  47.62,60.96 90 top
E$40  [LED3MM]  7.62,60.96 90 top
E$41  [LED3MM]  12.06,60.96 90 top
E$42  [LED3MM]  87.63,60.96 90 top
E$43  [LED3MM]  92.08,60.96 90 top
E$44  [LED3MM]  96.52,60.96 90 top
E$45  [LED3MM]  100.97,60.96 90 top
E$46  [LED3MM]  105.41,60.96 90 top
E$47  [LED3MM]  52.07,93.98 90 top
E$48  [LED3MM]  56.52,93.98 90 top
E$49  [LED3MM]  60.96,93.98 90 top
E$50  [LED3MM]  65.41,93.98 90 top
E$51  [LED3MM]  69.85,93.98 90 top
E$52  [LED3MM]  74.3,93.98 90 top
E$53  [LED3MM]  78.74,93.98 90 top
E$54  [LED3MM]  83.19,93.98 90 top
E$55  [LED3MM]  16.51,93.98 90 top
E$56  [LED3MM]  20.96,93.98 90 top
E$57  [LED3MM]  25.4,93.98 90 top
E$58  [LED3MM]  29.84,93.98 90 top
E$59  [LED3MM]  34.29,93.98 90 top
E$60  [LED3MM]  38.73,93.98 90 top
E$61  [LED3MM]  43.18,93.98 90 top
E$62  [LED3MM]  47.62,93.98 90 top
E$63  [LED3MM]  7.62,93.98 90 top
E$64  [LED3MM]  12.06,93.98 90 top
E$65  [LED3MM]  87.63,93.98 90 top
E$66  [LED3MM]  92.08,93.98 90 top
E$67  [LED3MM]  96.52,93.98 90 top
E$68  [LED3MM]  100.97,93.98 90 top
E$69  [LED3MM]  105.41,93.98 90 top
E$70  [LED3MM]  52.07,127 90 top
E$71  [LED3MM]  56.52,127 90 top
E$72  [LED3MM]  60.96,127 90 top
E$73  [LED3MM]  65.41,127 90 top
E$74  [LED3MM]  69.85,127 90 top
E$75  [LED3MM]  74.3,127 90 top
E$76  [LED3MM]  78.74,127 90 top
E$77  [LED3MM]  83.19,127 90 top
E$78  [LED3MM]  16.51,127 90 top
E$79  [LED3MM]  20.96,127 90 top
E$80  [LED3MM]  25.4,127 90 top
E$81  [LED3MM]  29.84,127 90 top
E$82  [LED3MM]  34.29,127 90 top
E$83  [LED3MM]  38.73,127 90 top
E$84  [LED3MM]  43.18,127 90 top
E$85  [LED3MM]  47.62,127 90 top
E$86  [LED3MM]  7.62,127 90 top
E$87  [LED3MM]  12.06,127 90 top
E$88  [LED3MM]  87.63,127 90 top
E$89  [LED3MM]  92.08,127 90 top
E$90  [LED3MM]  96.52,127 90 top
E$91  [LED3MM]  100.97,127 90 top
E$92  [LED3MM]  105.41,127 90 top
E$93  [LED3MM]  52.07,160.02 90 top
E$94  [LED3MM]  56.52,160.02 90 top
E$95  [LED3MM]  60.96,160.02 90 top
E$96  [LED3MM]  65.41,160.02 90 top
E$97  [LED3MM]  69.85,160.02 90 top
E$98  [LED3MM]  74.3,160.02 90 top
E$99  [LED3MM]  78.74,160.02 90 top
E$100  [LED3MM]  83.19,160.02 90 top
E$101  [LED3MM]  16.51,160.02 90 top
E$102  [LED3MM]  20.96,160.02 90 top
E$103  [LED3MM]  25.4,160.02 90 top
E$104  [LED3MM]  29.84,160.02 90 top
E$105  [LED3MM]  34.29,160.02 90 top
E$106  [LED3MM]  38.73,160.02 90 top
E$107  [LED3MM]  43.18,160.02 90 top
E$108  [LED3MM]  47.62,160.02 90 top
E$109  [LED3MM]  7.62,160.02 90 top
E$110  [LED3MM]  12.06,160.02 90 top
E$111  [LED3MM]  87.63,160.02 90 top
E$112  [LED3MM]  92.08,160.02 90 top
E$113  [LED3MM]  96.52,160.02 90 top
E$114  [LED3MM]  100.97,160.02 90 top
E$115  [LED3MM]  105.41,160.02 90 top
E$116  [LED3MM]  52.07,193.04 90 top
E$117  [LED3MM]  56.52,193.04 90 top
E$118  [LED3MM]  60.96,193.04 90 top
E$119  [LED3MM]  65.41,193.04 90 top
E$120  [LED3MM]  69.85,193.04 90 top
E$121  [LED3MM]  74.3,193.04 90 top
E$122  [LED3MM]  78.74,193.04 90 top
E$123  [LED3MM]  83.19,193.04 90 top
E$124  [LED3MM]  16.51,193.04 90 top
E$125  [LED3MM]  20.96,193.04 90 top
E$126  [LED3MM]  25.4,193.04 90 top
E$127  [LED3MM]  29.84,193.04 90 top
E$128  [LED3MM]  34.29,193.04 90 top
E$129  [LED3MM]  38.73,193.04 90 top
E$130  [LED3MM]  43.18,193.04 90 top
E$131  [LED3MM]  47.62,193.04 90 top
E$132  [LED3MM]  7.62,193.04 90 top
E$133  [LED3MM]  12.06,193.04 90 top
E$134  [LED3MM]  87.63,193.04 90 top
E$135  [LED3MM]  92.08,193.04 90 top
E$136  [LED3MM]  96.52,193.04 90 top
E$137  [LED3MM]  100.97,193.04 90 top
E$138  [LED3MM]  105.41,193.04 90 top
E$139  [LED3MM]  52.07,226.06 90 top
E$140  [LED3MM]  56.52,226.06 90 top
E$141  [LED3MM]  60.96,226.06 90 top
E$142  [LED3MM]  65.41,226.06 90 top
E$143  [LED3MM]  69.85,226.06 90 top
E$144  [LED3MM]  74.3,226.06 90 top
E$145  [LED3MM]  78.74,226.06 90 top
E$146  [LED3MM]  83.19,226.06 90 top
E$147  [LED3MM]  16.51,226.06 90 top
E$148  [LED3MM]  20.96,226.06 90 top
E$149  [LED3MM]  25.4,226.06 90 top
E$150  [LED3MM]  29.84,226.06 90 top
E$151  [LED3MM]  34.29,226.06 90 top
E$152  [LED3MM]  38.73,226.06 90 top
E$153  [LED3MM]  43.18,226.06 90 top
E$154  [LED3MM]  47.62,226.06 90 top
E$155  [LED3MM]  7.62,226.06 90 top
E$156  [LED3MM]  12.06,226.06 90 top
E$157  [LED3MM]  87.63,226.06 90 top
E$158  [LED3MM]  92.08,226.06 90 top
E$159  [LED3MM]  96.52,226.06 90 top
E$160  [LED3MM]  100.97,226.06 90 top
E$161  [LED3MM]  105.41,226.06 90 top

## Library data of the parts
E$1-E$161 = led

## Text on the board
Unrouted: 7 | 1 | 4 | 5 | 6 | 8 | 9 | 10 | 11 | 12 | 13 | 14 | 15 | 16 | 17 | 18 | 19 | 20 | 21 | 22 | 23 | 2 | 3 | VDD | RE2 | RE1 | * | * | RE0 | * | RA5 | * | RA4 | RA3 | * | 7 | 8 | 12 | 15 | 16 | 17 | 18 | 19 | 20 | 21 | 22 | 23 | 1 | 2 | 3 | 4 | 5 | 6 | 9 | 10 | 11 | 13 | 14 | VDD | RE2 | RE1 | * | * | RE0 | * | RA5 | * | RA4 | RA3 | * | 7 | 8 | 12 | 15 | 16 | 17 | 18 | 19 | 20 | 21 | 22 | 23 | 1 | 2 | 3 | 4 | 5 | 6 | 9 | 10 | 11 | 13 | 14 | VDD | RE2 | RE1 | * | * | RE0 | * | RA5 | * | RA4 | RA3 | * | 7 | 8 | 12 | 15 | 16 | 17 | 18 | 19 | 20 | 21 | 22 | 23 | 1 | 2 | 3 | 4 | 5 | 6 | 9 | 10 | 11 | 13 | 14 | VDD | RE2 | RE1 | * | * | RE0 | * | RA5 | * | RA4 | RA3 | * | 7 | 8 | 12 | 15 | 16 | 17 | 18 | 19 | 20 | 21 | 22 | 23 | 1 | 2 | 3 | 4 | 5 | 6 | 9 | 10 | 11 | 13 | 14 | VDD | RE2 | RE1 | * | * | RE0 | * | RA5 | * | RA4 | RA3 | * | 7 | 8 | 12 | 15 | 16 | 17 | 18 | 19 | 20 | 21 | 22 | 23 | 1 | 2 | 3 | 4 | 5 | 6 | 9 | 10 | 11 | 13 | 14 | VDD | RE2 | RE1 | * | * | RE0 | * | RA5 | * | RA4 | RA3 | * | 7 | 8 | 12 | 15 | 16 | 17 | 18 | 19 | 20 | 21 | 22 | 23 | 1 | 2 | 3 | 4 | 5 | 6 | 9 | 10 | 11 | 13 | 14 | VDD | RE2 | RE1 | * | * | RE0 | * | RA5 | * | RA4 | RA3 | *